# Altium PCB CUSensor.PcbDoc
Units mil, origin at the board's own origin, x right, y up, seen from the top; angles counter-clockwise.
Board outline 1673.23 x 1673.23 mil, 2 copper layers (Component Side, Bottom Layer), stack 60.8 mil thick; 43 components, 53 nets, 209 pads, 88 vias.
Unrouted connection lines stored in the file: 2.
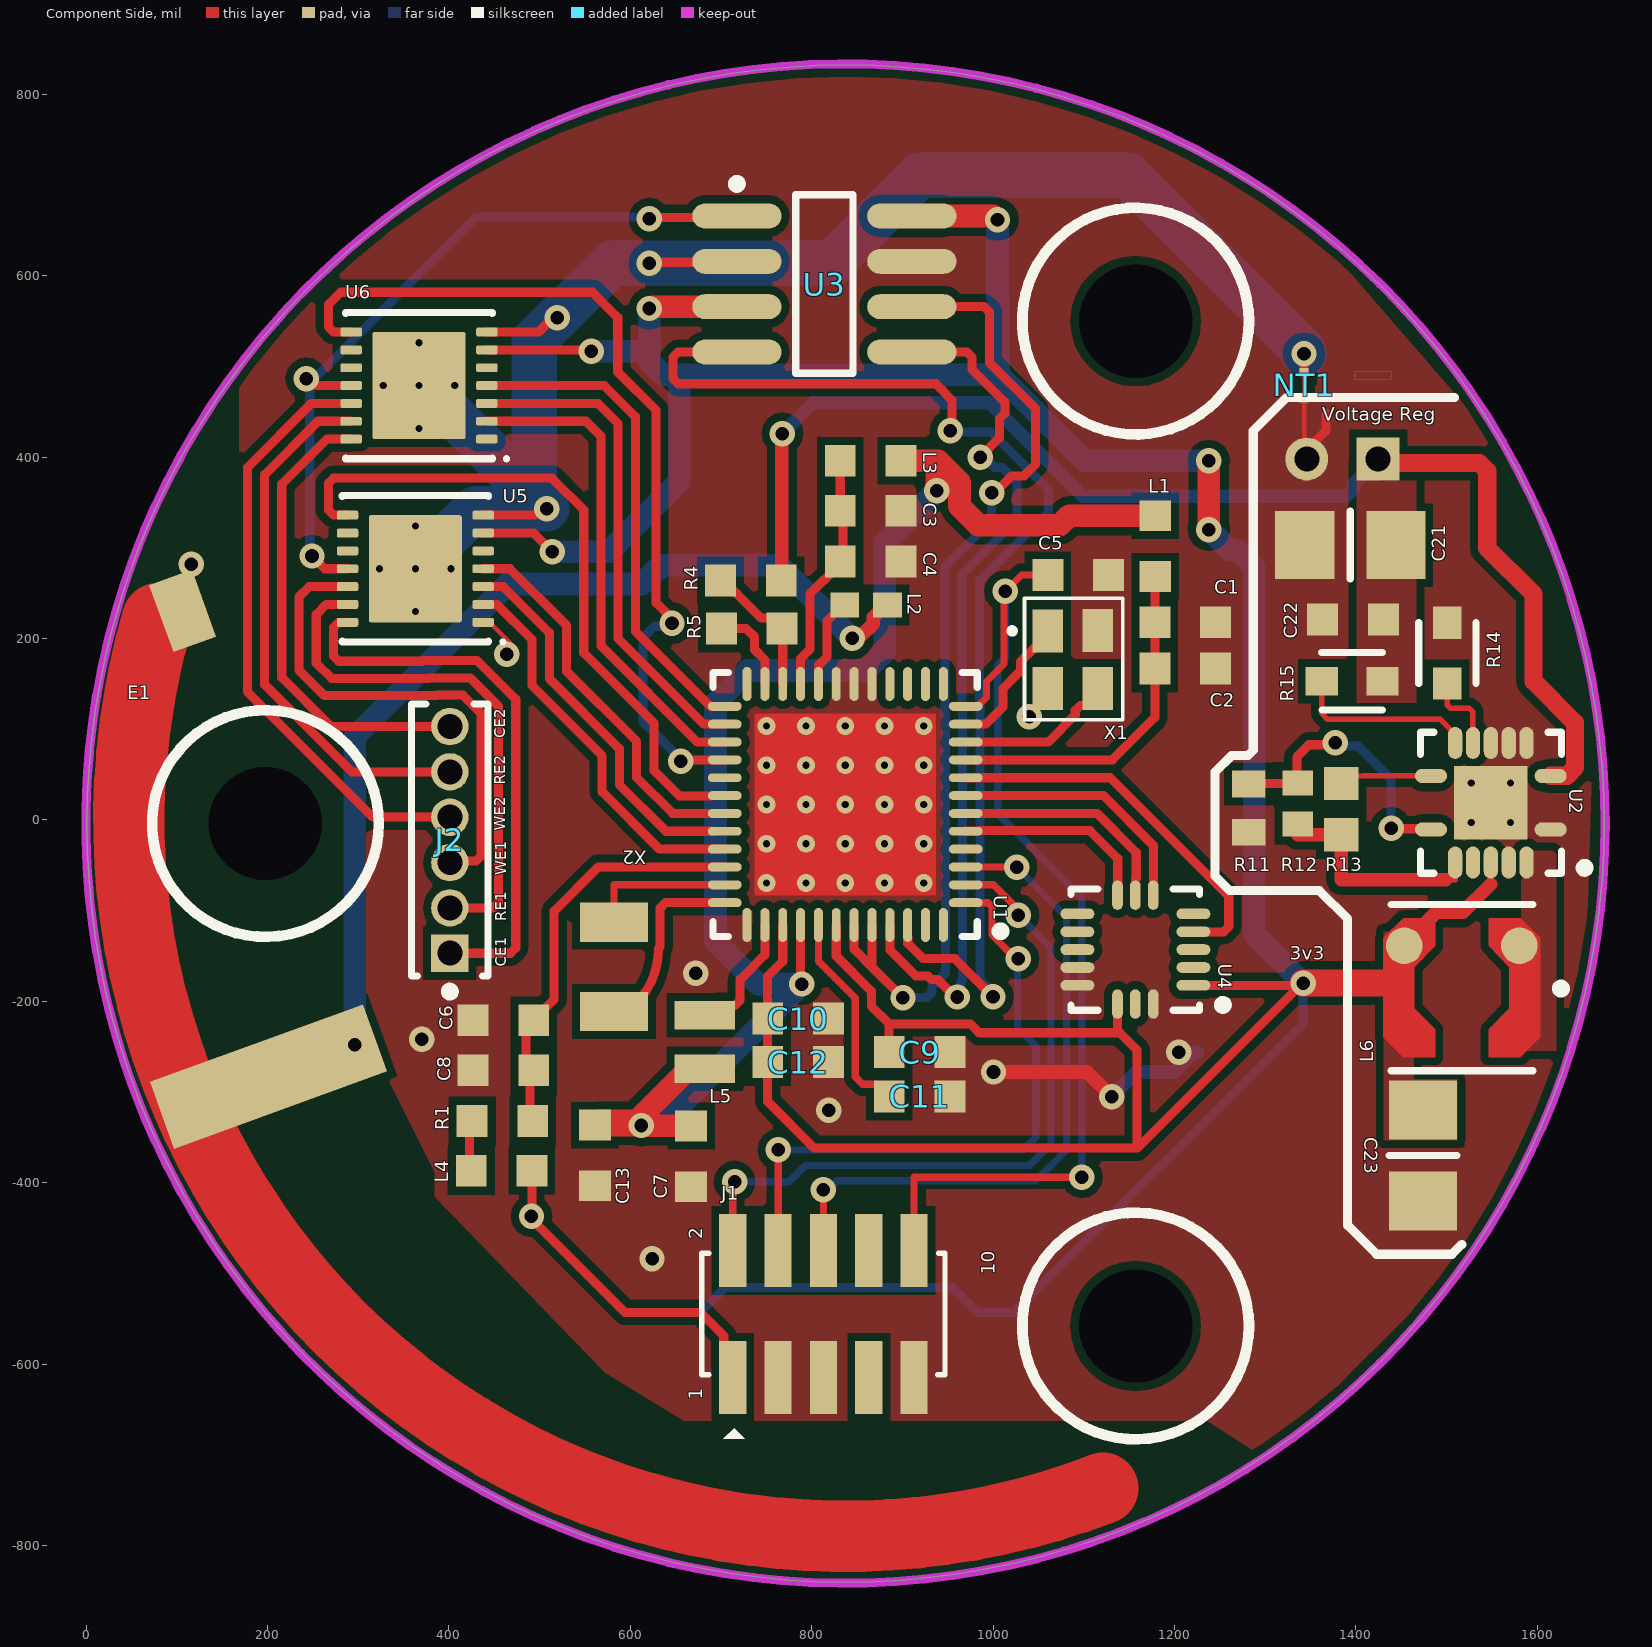
[diagram p0: Component Side view]
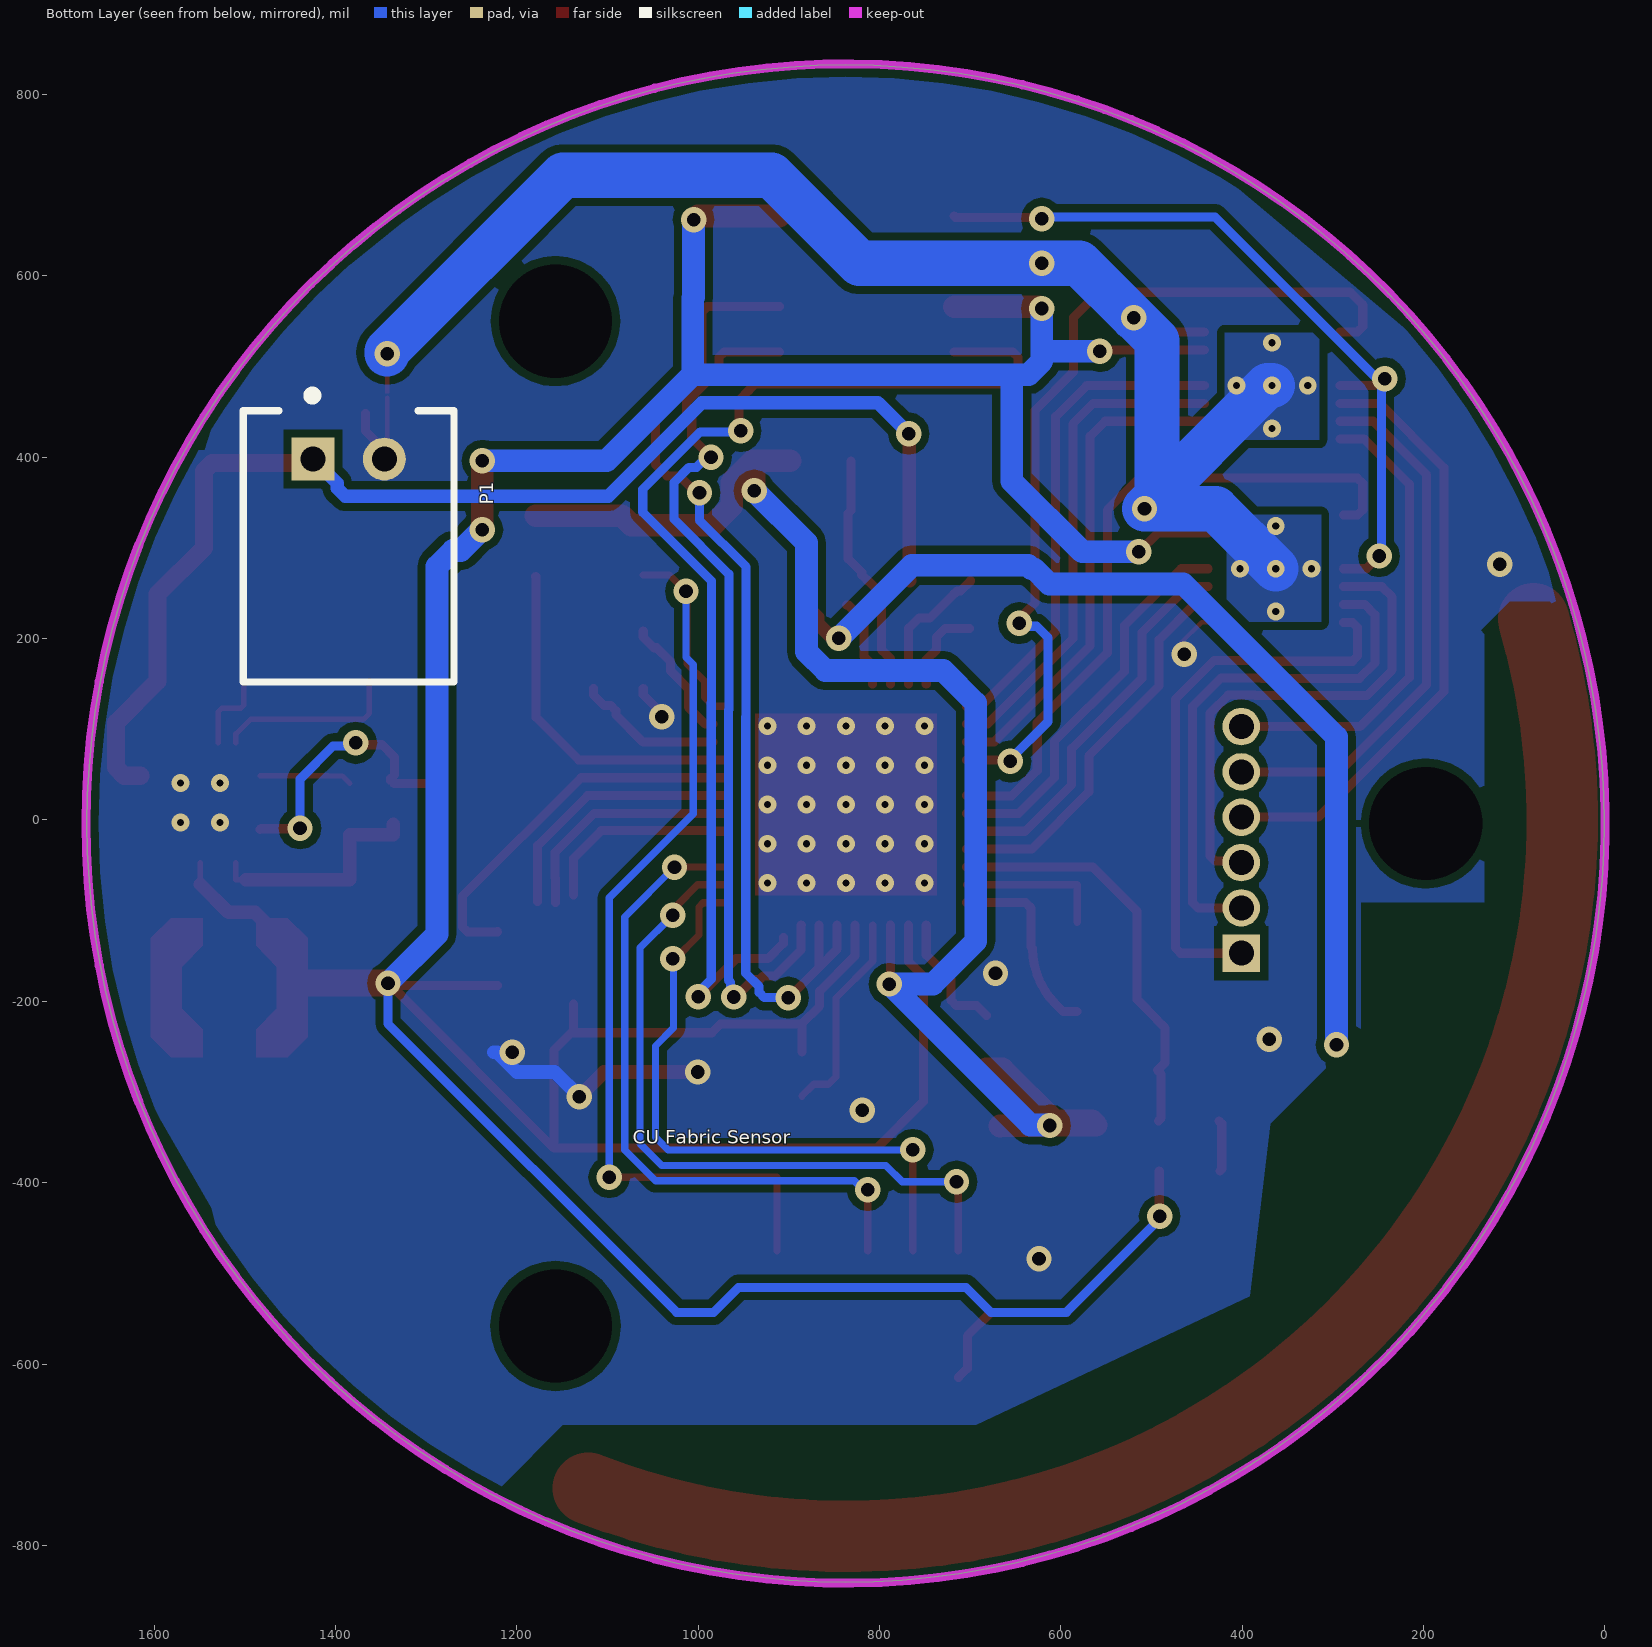
[diagram p1: Bottom Layer view, seen from below]

## Layer stack, top to bottom
Top Solder: solder mask 0.4, Solder Resist, Dk 3.5
Component Side: signal copper 1.4
Dielectric 1: core 58, FR-4, Dk 4.2
Bottom Layer: signal copper 1.4
Solder Side: solder mask 0.4, Solder Resist, Dk 3.5

## Board outline
837.39,-840.61 cw(c837.39,-4) 0.77,-4 cw(c837.39,-4) 837.39,832.61 cw(c837.39,-4) 1674,-4 cw(c837.39,-4)

## Design rules (kind name [scope] priority, off if disabled: settings)
Clearance [All] p1: gap=9 ignorepadtopadclearanceinfootprint=TRUE except(1: Arc-Arc; 8.5: Arc-SMDPad Track-SMDPad SMDPad-SMDPad)
ComponentClearance "Ignore E1 Clearance" [InComponent('E1')] p1: gap=0 collisioncheckmode=3 verticalgap=100000 showdistances=FALSE donotcheckwithout3dbody=TRUE
ComponentClearance [All] p2: gap=10 collisioncheckmode=3 verticalgap=10 showdistances=FALSE
HoleSize [All] p1: absolutevalues=TRUE maxlimit=1000 minlimit=1 maxpercent=80.000 minpercent=20.000
MinimumSolderMaskSliver [All] p1: minsoldermaskwidth=0.5
PlaneConnect [All] p1: planeconnectstyle=Direct reliefexpansion=20 reliefentries=4 reliefconductorwidth=10 reliefairgap=10
PolygonConnect [All] p1: connectstyle=Direct reliefconductorwidth=10 reliefentries=4 polygonreliefangle="90 Angle" airgapwidth=10
RoutingVias [All] p1: holewidth=15 width=28 viastyle="Through Hole" minholewidth=15 minwidth=28 maxholewidth=28 maxwidth=50
SilkToSilkClearance [All] p1: silktosilkclearance=1
SilkToSolderMaskClearance [IsPad] p1: minsilkscreentomaskgap=1 clearancetoexposedcopper=TRUE
SolderMaskExpansion [All] p1: expansion=4 istentingtop=FALSE
Width [All] p1: maxlimit=100 minlimit=5 preferedwidth=8
24 further rules are at their usual default settings.

## Components (designator, comment, footprint, x,y, rotation, side; value= is the part's Value field where it differs from the comment)
C1 "CAP CER .1UF 50V 10% X7R 0603" RESC1608N 1212,218 r180 top value=0.1uF
C2 "CAP CER 10nF 50V 10% X7R 0603" RESC1608N 1212,167 r180 top value=10nF
C3 "CAP CER .1UF 50V 10% X7R 0603" RESC1608N 865,341 r180 top value=0.1uF
C4 "CAP CER 10nF 50V 10% X7R 0603" RESC1608N 865,285 r180 top value=10nF
C5 "CAP CER .1UF 50V 10% X7R 0603" RESC1608N 1094,270 r0 top value=0.1uF
C6 "CAP CER .1UF 50V 10% X7R 0603" RESC1608N 460,-221 r0 top value=0.1uF
C7 "CAP CER 1UF 10V" RESC1608N 667,-371 r90 top value=1uF
C8 "CAP CER 10nF 50V 10% X7R 0603" RESC1608N 460,-276 r0 top value=10nF
C9 "CAP CER 1UF 10V" RESC1608N 919,-256 r180 top value=1uF
C10 "CAP CER .1UF 50V 10% X7R 0603" RESC1608N 785,-219 r180 top value=0.1uF
C11 "CAP CER 1UF 10V" RESC1608N 919,-305 r180 top value=1uF
C12 "Cap 22uF 0603" RESC1608N 785,-267 r180 top value=22uF
C13 "CAP 4.7uF  0603" RESC1608N 561,-370 r90 top value=4.7uF
C21 "22uF" FP-GCJ31C-0_3-IPC_B 1394,303 r180 top
C22 "CAP CER .1UF 50V 10% X7R 0603" RESC1608N 1397,221 r0 top value=0.1uF
C23 "22uF" FP-GCJ31C-0_3-IPC_B 1474,-370 r270 top
E1 "PCB_ANT" "PCB_ANT_2.4GHz CIRCULAR" 201,-283 r290 top locked value="50 Ohm"
J1 "SWDEBUG CONN NO SHROUD" "CONN SMT 10 pin Dual Row - 0.050\" FCI shroudless" 813,-544.88 r0 top locked
J2 "GRPB061VWVN-RC" SLIN-GRPB061VWVN-RC_V 401,-22 r90 top
L1 "MMZ1608B102C" RESC1608N 1179,302 r90 top value="1000 ohm"
L2 "Inductor 1.9nH" RESC1005N 860,237 r180 top value=1.9nH
L3 "MMZ1608B102C" RESC1608N 865,396 r0 top value="1000 ohm"
L4 "MMZ1608B102C" RESC1608N 458,-387 r0 top value="1000 ohm"
L5 "4.7uH 900mA" RESC2016N 682,-245 r270 top value=4.7uH
L6 "10uH" FP-LPS4018-MFG 1517,-185 r180 top
NT1 "TCF_NetTie1" TCF_NetTie1-Footprint-1 1343,475.55 r90 top net-tie
P1 "S2B-PH-K-S(LF)(SN)" JST-S2B-PH-K-S_V 1385.37,301.54 r180 bottom
R1 "RC1608F2R0CS" RESC1608N 459,-332 r180 top value="2 ohm"
R4 "1MEG" RESC1608N 733,264 r0 top
R5 "1MEG" RESC1608N 734,211 r0 top
R11 "4.12m" RESC1608X05N 1282,13 r90 top
R12 "634k" RESC1609X50X30LL10T20 1336,18 r270 top
R13 "8.25m" FP-CRCW0603-e3-IPC_B 1384,12 r270 top
R14 "10k" FP-RT0603-MFG 1501,184 r90 top value=10KΩ
R15 "10k" FP-RT0603-MFG 1396,153 r0 top value=10KΩ
U1 "EFR32BG12P433F1024GM48" QFN50P700X700X90_HS-49N 837,17 r180 top
U2 "TPS62736" QFN127P600-8N 1549,19 r180 top
U3 "DAC8830IBD" TI-D8_M 814,591 r0 top
U4 "ADXL362BCCZ-R2" ADI-CC-16-4_M 1157,-143 r180 top
U5 "LMP91000SDE/NOPB" NHL0014B_V 363,277 r180 top
U6 "LMP91000SDE/NOPB" NHL0014B_V 367,479 r180 top
X1 "38.4MHz" "CRYSTAL SMD 2.5x2.0 ABRACON" 1088,177 r270 top
X2 "32.768KHz" Crystal_SMD_3.2x1.5mm 582,-162 r270 top

## Footprints (in the part's own frame and the unit in brackets; to place one, negate y for a bottom-side part, rotate by r counter-clockwise, add the part's x,y. Pads: shape width x height; smd on the part's side, far side on the other; paste and mask are expansions set on the pad)
ADI-CC-16-4_M [mm] "QFN, 16-Leads, Body 3.25x3mm, Pitch 0.5mm, IPC Low Density"
  oval 0.95x0.3 smd: 1(-1.625,1) 2(-1.625,0.5) 3(-1.625,0) 4(-1.625,-0.5) 5(-1.625,-1) 9(1.625,-1) 10(1.625,-0.5) 11(1.625,0) 12(1.625,0.5) 13(1.625,1)
  oval 0.3x0.825 smd: 6(-0.5,-1.525) 7(0,-1.525) 8(0.5,-1.525) 14(0.5,1.525) 15(0,1.525) 16(-0.5,1.525)
  silkscreen extent -2.58,-1.7 1.8,1.7, body extent -1.65,-1.55 1.65,1.55, height 1.14
"CONN SMT 10 pin Dual Row - 0.050\" FCI shroudless" [mm] "FCI 20021121-00010C4LF  2x10 shroudless header 0.050\" spacing, SMT"
  rect 0.76x2.05 smd: 1(-2.54,-1.775) 2(-2.54,1.775) 3(-1.27,-1.775) 4(-1.27,1.775) 5(0,-1.775) 6(0,1.775) 7(1.27,-1.775) 8(1.27,1.775) 9(2.54,-1.775) 10(2.54,1.775)
  silkscreen extent -3.4,-3.5 3.4,1.7, body extent -3.17,-2.75 3.17,2.75, height 4.51
"CRYSTAL SMD 2.5x2.0 ABRACON" [mm] "Pads for Abracon Crystal 2.5x2mm"
  rect 1.2x0.85 smd: 1(-0.8,-0.7) 2(0.813,-0.7) 3(0.813,0.7) 4(-0.813,0.7)
  silkscreen extent -1.71,-1.76 1.69,1.4, body extent -1.3,-1.05 1.3,1.05, height 0.6
Crystal_SMD_3.2x1.5mm [mm] "Pads to fit typical 32.768 crystal such as ECX-31B"
  rect 1.1x1.9 smd: 1(-1.25,0) 2(1.25,0)
  body extent -1.62,-0.77 1.62,0.77, height 0.9
FP-CRCW0603-e3-IPC_B [mil]
  rect 36.81x37.88 smd paste+0 mask+0: 1(-28.17,0) 2(28.17,0)
  body extent -56,-29 56,29, height 10
FP-GCJ31C-0_3-IPC_B [mil]
  rect 65.08x74.97 smd paste+0 mask+0: 1(-50.22,0) 2(50.22,0)
  silkscreen extent 0,-37 0,37, body extent -93,-47 93,47, height 10
FP-LPS4018-MFG [mil]
  round 40.39 smd paste+0 mask+0: 1(-63.42,-46.25) 2(63.42,-46.25)
  Component Side region: -86.61,-54.92 -86.61,54.92 -64.57,76.57 -29.53,76.57 -29.53,46.06 -52.36,22.64 -52.36,-22.64 -29.53,-46.06 -29.53,-76.57 -64.57,-76.57
  Component Side region: 86.61,-54.92 86.61,54.92 64.57,76.57 29.53,76.57 29.53,46.06 52.36,22.64 52.36,-22.64 29.53,-46.06 29.53,-76.57 64.57,-76.57
  silkscreen extent -114,-92 78,92, body extent -91,-82 91,82, height 10
FP-RT0603-MFG [mm]
  rect 0.9x0.8 smd paste+0 mask+0: 1(-0.85,0) 2(0.85,0)
  silkscreen extent -0.85,-0.81 0.86,0.8, body extent -1.4,-0.55 1.4,0.55, height 0.25
JST-S2B-PH-K-S_V [mm] "THD, 2-Leads, Body 7.6x5.9mm, Pitch 2mm"
  rect 1.2x1.2 hole 0.7: 1(-1,2.45)
  round 1.2 hole 0.7: 2(1,2.45)
  silkscreen extent -2.95,-3.8 2.95,4.35, body extent -2.95,-3.8 2.95,3.8, height 4.8
NHL0014B_V [mm] "SON, 10-Leads, Body 4x4mm, Pitch 0.5mm, Thermal Pad 3x2.6mm, TI Recommend"
  rrect40% 0.6x0.25 smd: 1(-1.9,1.5) 2(-1.9,1) 3(-1.9,0.5) 4(-1.9,0) 5(-1.9,-0.5) 6(-1.9,-1) 7(-1.9,-1.5) 8(1.9,-1.5) 9(1.9,-1) 10(1.9,-0.5) 11(1.9,0) 12(1.9,0.5) 13(1.9,1) 14(1.9,1.5)
  rrect4% 2.6x3 smd paste-1.3: 15(0,0)
  silkscreen extent -2.5,-2.05 2.05,2.1, body extent -2,-2 2,2, height 0.8
"PCB_ANT_2.4GHz CIRCULAR" [mm]
  rect 2x6.35 smd paste-4.5 mask+0: 1(0,0)
  rect 2x1.27 smd paste-4.5 mask+0: 2(-13.077,2.2)
  Component Side lines w2: -13.107,1.465 ccw(c-1.23,17.639) 18.833,18.021
QFN50P700X700X90_HS-49N [mm] "QFN, 48-Leads, Body 7.00x7.00mm, Pitch 0.50mm, Thermal Pad 5.30x5.30mm, IPC Medium Density"
  oval 0.95x0.25 smd: 1(-3.375,2.75) 2(-3.375,2.25) 3(-3.375,1.75) 4(-3.375,1.25) 5(-3.375,0.75) 6(-3.375,0.25) 7(-3.375,-0.25) 8(-3.375,-0.75) 9(-3.375,-1.25) 10(-3.375,-1.75) 11(-3.375,-2.25) 12(-3.375,-2.75) 25(3.375,-2.75) 26(3.375,-2.25) 27(3.375,-1.75) 28(3.375,-1.25) 29(3.375,-0.75) 30(3.375,-0.25) 31(3.375,0.25) 32(3.375,0.75) 33(3.375,1.25) 34(3.375,1.75) 35(3.375,2.25) 36(3.375,2.75)
  oval 0.25x0.95 smd: 13(-2.75,-3.375) 14(-2.25,-3.375) 15(-1.75,-3.375) 16(-1.25,-3.375) 17(-0.75,-3.375) 18(-0.25,-3.375) 19(0.25,-3.375) 20(0.75,-3.375) 21(1.25,-3.375) 22(1.75,-3.375) 23(2.25,-3.375) 24(2.75,-3.375) 37(2.75,3.375) 38(2.25,3.375) 39(1.75,3.375) 40(1.25,3.375) 41(0.75,3.375) 42(0.25,3.375) 43(-0.25,3.375) 44(-0.75,3.375) 45(-1.25,3.375) 46(-1.75,3.375) 47(-2.25,3.375) 48(-2.75,3.375)
  rect 5.3x5.3 on Mech13: 49(0,0)
  Component Side region: -2.54,2.54 2.54,2.54 2.54,-2.54 -2.54,-2.54
  silkscreen extent -4.47,-3.7 3.7,3.7, body extent -3.55,-3.55 3.55,3.55, height 0.9
QFN127P600-8N [mm]
  oval 0.9x0.4 smd: 1(-1.675,-0.75) 7(1.675,-0.75) 8(1.675,0.75) 14(-1.675,0.75)
  oval 0.4x0.9 smd: 2(-1,-1.675) 3(-0.5,-1.675) 4(0,-1.675) 5(0.5,-1.675) 6(1,-1.675) 9(1,1.675) 10(0.5,1.675) 11(0,1.675) 12(-0.5,1.675) 13(-1,1.675)
  rect 2.05x2.05 smd: 15(0,0)
  silkscreen extent -2.75,-1.97 1.97,1.97, body extent -1.83,-1.83 1.83,1.83, height 1
RESC1005N [mm] "Chip Resistor, Body 1.1x0.5mm, IPC Medium Density"
  rect 0.8x0.7 smd: 1(-0.6,0) 2(0.6,0)
  body extent -0.55,-0.3 0.55,0.3, height 0.4
RESC1608N [mil] "Chip Resistor, Body 1.6x0.8mm, IPC Medium Density"
  rect 34x35 smd: 1(-33.46,0) 2(33.46,0)
  body extent -33,-19 33,19, height 24
RESC1608X05N [mm] "Chip Resistor, 2-Leads, Body 1.58x0.85mm, IPC Medium Density"
  rect 0.75x0.95 smd: 1(-0.675,0) 2(0.675,0)
  body extent -0.82,-0.48 0.82,0.48, height 0.5
RESC1609X50X30LL10T20 [mm] "Chip Resistor, 2-Leads, Body 1.55x0.85mm, IPC High Density"
  rect 0.7x0.85 smd: 1(-0.575,0) 2(0.575,0)
  body extent -0.82,-0.48 0.82,0.48, height 0.5
RESC2016N [mm] "Chip Resistor, Body 2.0x1.6mm, IPC Medium Density"
  rect 0.8x1.7 smd: 1(-0.75,0) 2(0.75,0)
  body extent -1.05,-0.85 1.05,0.85, height 1
SLIN-GRPB061VWVN-RC_V [mm] "Header, 6-Leads, Body 7.62x2.14mm, Pitch 1.27mm"
  rect 1.05x1.05 hole 0.7: 1(-3.175,0)
  round 1.05 hole 0.7: 2(-1.905,0) 3(-0.635,0) 4(0.635,0) 5(1.905,0) 6(3.175,0)
  silkscreen extent -4.37,-1.07 3.81,1.07, body extent -3.81,-1.07 3.81,1.07, height 4
TCF_NetTie1-Footprint-1 [mil]
  rect 10x10 smd mask-10: A(-10,0) B(18,0)
  Component Side region: -5.5,-2.5 14.5,-2.5 14.5,2.5 -5.5,2.5
TI-D8_M [mm] "SOIC, 8-Leads, Body 4.9x3.9mm, Pitch 1.27mm, IPC Low Density"
  oval 2.5x0.7 smd: 1(-2.45,1.905) 2(-2.45,0.635) 3(-2.45,-0.635) 4(-2.45,-1.905) 5(2.45,-1.905) 6(2.45,-0.635) 7(2.45,0.635) 8(2.45,1.905)
  silkscreen extent -2.57,-2.5 0.8,2.93, body extent -2,-2.5 2,2.5, height 1.75

## Part data
C1 C3 C5 C6 C10: library part "Cap Ceramic 0.1uF 0603_50V", Manufacturer=Murata, Manufacturer Part#=GRM188R71H104KA93D, PackageDocument=Mar-2001, Voltage=50V, COST=$0.006, Digikey Part#=490-1519-2-ND, Note="Footprint corresponds to dimensions for bulk cassette packaging. This case size has tightened tolerances.", PackageReference=0603
  C1: Supplier 1=Digi-Key, Supplier 2=Digi-Key, Supplier Part Number 2=587-3247-1-ND
  C3: Supplier 1=Mouser
  C5: Supplier 1=Arrow, Supplier Part Number 1=GRM188R71H104KA93D
C2 C4 C8: library part "Cap Ceramic 10nF 0603", "CAP CER 10000PF 50V 10% X7R 0603", Manufacturer=Murata, Manufacturer Part#=GRM188R71H103KA01D, Voltage=50V, COST=$0.005, Digikey Part#=490-1512-1-ND, PackageReference=0603
  C2: Supplier 1=Digi-Key
  C4: Supplier 1=Arrow
C7 C9 C11: library part "Cap Ceramic 1uF_10V_ 0603", "CAP CER 1UF 10V 10% X7R 0603", Manufacturer=Taiyo-Yuden, Manufacturer Part#=LMK107B7105KA-T, Voltage=10V, COST=0.007, Digikey Part#=587-1242-2-ND, PackageReference=0603
C12: library part "Cap Ceramic 22uF 0603 6.3V", "CAP CER 22UF 6.3V 20% X5R 0603", Manufacturer="Samsung Electro-Mechanics America", Manufacturer Part#=CL10A226MQ8NRNE, Voltage=6.3V, COST=$0.051, Digikey Part#=1276-2868-2-ND, PackageReference=0603
C13: library part "Cap Ceramic 4.7UF 16V 0603", "CAP CER 4.7UF 16V 10% X5R 0603", Manufacturer="Taiyo Yuden", Manufacturer Part#=EMK107ABJ475KA-T, Voltage=16V, COST=$0.047, Digikey Part#=587-2786-2-ND, PackageReference=0603
C21 C23: library part CMP-06035-051043-1, "Cap Ceramic 22uF 10V X7R 10% Pad SMD 1206 Soft Termination  +125°C Automotive T/R"
C22: library part "Cap Ceramic 0.1uF 0603_50V", Manufacturer=Murata, Manufacturer Part#=GRM188R71H104KA93D, PackageDocument=Mar-2001, Voltage=16V, COST=$0.006, Digikey Part#=490-1519-2-ND, Note="Footprint corresponds to dimensions for bulk cassette packaging. This case size has tightened tolerances.", PackageReference=0603, Supplier 1=Mouser
E1: library part Antenna_2.4GHZ_Printed_Copper_Circular, "Antenna 2.4GHz_PCB Printed", COST=$0.0
J1: library part "CONN JTAG SMT NO SHROUD NXP", "CONN HEADER 10POS DL UNSHRD SMD", Manufacturer=FCI, Manufacturer Part#=20021121-00010C4LF, COST=$0.60, Digikey Part#=609-3695-1-ND, Note=2x5, PackageReference="SMT_2x5_050\""
J2: library part CMP-2000-06374-1, "Male Header, Pitch 1.27 mm, 1 x 6 Position, Height 4 mm, Tail Length 2.3 mm, -40 to 105 degC, RoHS, Bulk", Manufacturer=Sullins, Package Description="Male Header, Pitch 1.27 mm, 1 x 6 Position, Height 4 mm, Tail Length 2.3 mm", Standard Package=1, Catalog Drawings=S9014ESeriesTop, Category=Connectors,Interconnects, Connector Type=Header,Unshrouded, Contact Finish=Gold, Contact Finish Thickness=Flash, Contact Mating Length="0.118\"(3.00mm)", Contact Type=MalePin, Datasheet URL=http://www.sullinscorp.com/drawings/71_GRPB___1VWVN-RC,_10957-C.pdf, Datasheet Version="Rev. C, 12/2008", Dynamic Catalog=GRPB, Family=RectangularConnectors-Headers,MalePins, Manufacturer URL=http://www.sullinscorp.com/, Mating Products="S9010E-06-ND / -CONNHEADER.050\"6POSR/APCB / S9008E-06-ND / -CONNHEADER.050\"6POSPCBGOLD / S9005E-06-ND / -CONNHEADER.050\"6POSSMDGOLD", Mounting Technology=ThroughHole, Mounting Type=ThroughHole, Number of Positions=6, Number of Positions Loaded=All, Number of Rows=1, Other Names=S9014E-06, Package Reference=GRPB061VWVN-RC, Packaging=Bulk, Pitch="0.050\"(1.27mm)", Termination=Solder
L1 L3 L4: library part "Ind Filter 0.3A_0603", "FERRITE CHIP 1000 OHM 300MA 0603", Manufacturer=TDK, COST=$0.025, Digikey Part#=445-8672-1-ND, Imax=300mA, Manufacturer Part#=MMZ1608B102C, PackageReference=0603
L2: library part "Ind Signal 1.9nH 220mA 300mohm 0402", Manufacturer=Murata, Manufacturer Part#=LQP15MN1N9W02D, COST=$0.09, Digikey Part#=490-11739-6-ND, PackageReference=0402
L5: library part "IND PWR 4.7uH 900mA 360mohm 0806", "FIXED IND 4.7UH 900MA 360 MOHM", Current Rating=1.6A, Manufacturer=Bourns, Manufacturer Part#=SRN2010TA-4R7M, COST=$0.50, DCR="360 mOhm", Digikey Part#=SRN2010TA-4R7MCT-ND, Isat=900mA, PackageReference=0806
L6: library part CMP-11268-000063-1, "Shielded Power Inductors", DC Resistance (DCR)=200mR, Inductance Tolerance=20%, Max DC Current=1.3A, Max Operating Temperature=85°C, Min Operating Temperature=-40°C, Package Quantity=1, RMS Current (Irms)=900mA, Saturation Current=1.2A, Self Resonant Frequency=40MHz, Test Frequency=100kHz, Core Material=Ferrite, Height=1.7mm, Inductance=10uH, Length=4mm, Packaging="Cut Tape", REACH SVHC="No SVHC", Shielding=Shielded, Termination=SMD/SMT, Tolerance=20%, Weight=0.003527oz, Width=4mm
NT1: library part CMP-001-0001-3, "A Net Tie"
P1: library part CMP-1755-00004-1, "Male Header, Pitch 2 mm, 1 x 2 Position, Height 4.8 mm, Tail Length 3.4 mm, -25 to 85 degC, RoHS, Bulk", Capacitance="10 uF", Case\Package=Radial, Max Operating Temperature="85 degC", Min Operating Temperature="-40 degC", Package Quantity=200, Tolerance=20%, Voltage Rating="50 V", ComponentLink1Description=Datasheet, ComponentLink1URL=http://www.jst-mfg.com/product/pdf/eng/ePH.pdf, DatasheetVersion=Dec-12, Diameter="5 mm", Height="11 mm", Lead Pitch="2 mm", Length="11 mm", Mount="Through Hole", PackageDescription="Male Header, Pitch 2 mm, 1 x 2 Position, Height 4.8 mm, Tail Length 3.4 mm", PackageReference=S2B-PH-K-S, Packaging=Bulk, Pins=2, Radiation Hardening=No, REACH SVHC="No SVHC", RoHSCompliant=true, Voltage Rating (DC)="50 V"
R1: library part "RES SMT 2 ohm  1% 0603", "RES SMD 2 OHM 1% 1/10W 0603", Manufacturer=Samsung, COST=$0.001, Digikey Part#=1276-4476-1-ND, Manufacturer Part#=RC1608F2R0CS, Note=+/-1%, PackageReference=0603
R4 R5: library part "RES SMT 1MEG 1% 0603", "RES SMD 1M OHM 1% 1/10W 0603", Manufacturer=Panasonic, Manufacturer Part#=ERJ-3EKF1004V, COST=$0.002, Digikey Part#=P1.00MHTR-ND, Note=+/-1%, PackageReference=0603
R11: library part CMP-009-00178-1, "RES SMD 4.12M OHM 1% 1/10W 0603"
R12: library part CMP-1012-00827-2, Manufacturer="Vishay Dale", Part Number=CRCW0603634KFKEA
R13: library part CMP-02407-005912-1, "RES Thick Film, 8.25MΩ, 1%, 0.1W, 100ppm/°C, 0603", Case Code (Imperial)=0603, Case Code (Metric)=1608, Max Operating Temperature=155°C, Max Power Dissipation=100mW, Min Operating Temperature=-55°C, Package Quantity=10, Resistance=8.25MR, Temperature Coefficient=100ppm/°C, Tolerance=1%, Voltage Rating=75V, Case/Package=0603, Composition="Thick Film", Contact Plating=Tin, Depth=0.85mm, Features="Automotive AEC-Q200", Height=0.02inch, Lead Free="Lead Free", Length=1.55mm, Military Standard=Not, Number of Terminations=2, Packaging="Tape and Reel", Power Rating=100mW, Radiation Hardening=No, Termination=SMD/SMT, Voltage Rating (DC)=75V, Weight=7.1E-05oz, Width=0.033inch
R14 R15: library part CMP-2000-04517-2, "RES SMD 10K OHM 0.1% 1/10W 0603", Manufacturer=Yageo, Manufacturer Part Number=RT0603BRE0710KL, Package=RT0603, Power Rating=0.1W, Resistance=10KΩ, Temperature="-55°C to +155°C", Temperature Coefficient="50 ppm/°C", Temperature Range High=+155°C, Temperature Range Low=-55°C, Tolerance=0.001, Voltage Rating=75V, Automotive=No, Category=Res, ComponentLink2Description=Datasheet, ComponentLink2URL=http://www.yageo.com/documents/recent/PYu-RT_1-to-0.01_RoHS_L_9.pdf, Composition="Thin Film", Device Class L1="Passive Components", Device Class L2=Resistors, Device Class L3="Chip SMD Resistors", Digikey Description="RES SMD 10K OHM 0.1% 1/10W 0603", Footprint Url=http://www.yageo.com/exep/pages/download/literatures/PYu-R_Mount_10.pdf, Height=0.55mm, Ipc Land Pattern Name=RESC16080X45, Lead Free=Yes, Mouser Description="Res Thin Film 0603 10K Ohm 0.1% 1/10W ±50ppm/°C Molded SMD SMD Paper T/R", Octopart=https://octopart.com/rt0603bre0710kl-yageo-1273959, RoHS=TRUE, Series=RT
U2: library part CMP-019-00051-4, "High Efficiency Nanopower Buck Converter with 50mA Load Capability"
U3: library part CMP-0004-00140-1, "16-Bit, Ultra-Low Power, Voltage Output Digital to Analog Converter, -40 to 85 degC, 8-pin SOIC (D8), Green (RoHS & no Sb/Br)", Manufacturer="Texas Instruments", Power Consumption(Typ)(mW)=0.015, Code_JEDEC=MS-012, ComponentLink1Description="Manufacturer URL", ComponentLink1URL=http://www.ti.com/, ComponentLink2Description=Datasheet, ComponentLink2URL=http://www.ti.com/general/docs/lit/getliterature.tsp?genericPartNumber=DAC8830&fileType=pdf, ComponentLink3Description="Package Specification", ComponentLink3URL=http://www.ti.com/litv/pdf/msoi002j, DAC Channels=1, DatasheetVersion=SLAS449D, DNL(Max)(+/-LSB)=1, Eco-Plan="Green (RoHS & no Sb/Br)", INL(Max)(+/-LSB)=2, Interface="Serial SPI", Mounting Technology="Surface Mount", PackageDescription="8-Pin Plastic Small Outline, Body 4.9 x 3.9 mm, Pitch 1.27 mm", PackageReference=D8, PackageVersion="4040047-3/M, 06/2011", PartNumber=DAC8830IBD, Resolution(Bits)=16, Settling Time(us)=1, SubFamily="Precision DAC (=<10MSPS)"
U4: library part CMP-0885-00039-1, "Micropower, 3-Axis, +/-2 g / +/-4 g / +/-8 g Digital Output MEMS Accelerometer with 200 Hz BW, Industrial, 16-pin LGA, Reel", Manufacturer="Analog Devices", Supply Current="1.8 uA", Voltage Supply (V)="1.6 to 3.5", # of Axes=3, -3dB Bandwidth="200 Hz", ComponentLink1Description="Manufacturer URL", ComponentLink1URL=http://www.analog.com/en/index.html, ComponentLink2Description=Datasheet, ComponentLink2URL=http://www.analog.com/static/imported-files/data_sheets/ADXL362.pdf, ComponentLink3Description="Package Specification", ComponentLink3URL=http:/www.analog.com/static/imported-files/packages/PKG_PDF/LGA(CC)/CC_16_4.pdf, ComponentLink4Description="Product URL", ComponentLink4URL=http://www.analog.com/en/mems-sensors/mems-inertial-sensors/adxl362/products/product.html, DatasheetVersion="Rev. B", Mounting Technology="Surface Mount", Output Type=Digital, PackageDescription="16-Pin Land Grid Array, 3.25 x 3 mm Body, 0.5 mm Pitch", PackageReference=CC-16-4, PackageVersion="10-23-2012-A, 10/2012", Packing=Reel, PartNumber=ADXL362BCCZ-R2, Sensitivity="1/2/4 mg/LSB"
U5 U6: library part CMP-0064-00201-2, "Configurable AFE Potentiostat for Low-Power Chemical Sensing Applications, 14-pin LLP, 250 Reel", Manufacturer="Texas Instruments", PackageTopMarking=NS*UZXYTT*L91000, PowerWise=N, ComponentLink1Description="Datasheet URL", ComponentLink1URL=http://www.ti.com/general/docs/lit/getliterature.tsp?genericPartNumber=LMP91000&fileType=pdf, CompType=OtherParts, PackageDescription="LLP, Plastic, Dual, 4 x 4 x 0.8mm Body, 14 Lead, 0.5mm Pitch, No Pullback", PackageReference=NHL0014B, PinCount=14, RoHS=Y
X1: library part "CRYSTAL 38.4MHZ 7PF_SMD_2.5mmx2mm", "CRYSTAL 38.4MHZ 7pF", Manufacturer=Abracon, Manufacturer Part#=ABM10W-38.4000MHZ-7-D1X-T3, COST=$0.42, Digikey Part#=535-13784-2-ND, PackageReference=4-SMD
X2: library part "Crystal_32.768KHz 12.5pF SMD 3.2x1.5mm ECS ECS-.327-12.5-34B-TR", "CRYSTAL 32.7680KHZ 12.5PF SMD", Manufacturer=ECS, Manufacturer Part#=ECS-.327-12.5-34B-TR, COST=$0.244, CPAR=12.5pF, Digikey Part#=XC1617TR-ND, PackageReference=SMD_3.2x1.5

## Free pads (board coordinates)
  round 0 hole 125 unplated paste+0: 1(197.62,-4)
  round 0 hole 125 unplated: 1(1157.27,-558.05) 1(1157.27,550.05)

## Via types
v1: diameter 28, hole 15, Component Side to Bottom Layer, 49 vias
v2: diameter 19.68, hole 7.87, Component Side to Bottom Layer, 39 vias

## Nets (pads, with @x,y where several pads share a name; then routed paths per layer and width w, separated by ;. In a path a pad name is that pad's centre, name@x,y a point inside that pad or via, vN(x,y) a via of type N, cw(c..) or ccw(c..) an arc to the next point about the centre after c; other vN are vias at no path point)
ACC_INT1: U4.11
ACC_INT2: U4.9
ACC_SPI_EN_LOW: U1.5 U4.8 | length 221.2
  Component Side w10: U1.5 983.5,-12.53 984.18,-11.84 1106.84,-11.84 1137.59,-42.59 1137.59,-82.68 U4.8
ACC_SPI_MISO: U1.6 U4.7 | length 261.1
  Component Side w10: U1.6 1114.71,7.16 1158,-36.13 1158,-63.87 1157.28,-64.59 U4.7@1157.28,-90.86
ACC_SPI_MOSI: U1.7 U4.6 | length 291.5
  Component Side w10: U1.7 1121.9,26.84 1177,-28.26 U4.6@1177,-89.86
ACC_SPI_SCLK: U1.8 U4.4 | length 419.3
  Component Side w10: U1.8 1129.08,46.53 1260,-84.39 1260,-117.74 1254.14,-123.59 1221.26,-123.59 U4.4
AGND: NT1.B U3.2 U5.7 U5.15 U6.7 U6.15 | length 1823.8
  Component Side w10: U5.7 495.67,336.06 502.87,343.26 v1(507.74,343.26) ; U6.7 498.88,538.06 514.75,553.92 v1(519.62,553.92) ; v1(621,614) 622,615 716.54,615 U3.2 ; NT1.B v1(1343,514)
  Bottom Layer w50: v2(363,277) 429.26,343.26 v1(507.74,343.26) 372,479 v2(367,479) ; 494,357 494,528.6 519.33,553.92 v1(519.62,553.92) 579.69,614 v1(621,614) 822,614 919,711 1149,711 1343,517 v1(1343,514)
  other v2: 363,229.76 323.63,277 402.37,277 363,324.24 367,431.76 327.63,479 406.37,479 367,526.24
BATT_PWR_MON_HI: R4.1 R5.2 U1.22 | length 152.2
  Component Side w10: R4.1 699.54,263.5 710.54,252.5 714.07,252.5 717.57,249 718.04,249 744.54,222.5 756.46,222.5 767.46,211.5 768.1,211.5 U1.22
BATT_PWR_MON_LO: R5.1 U1.23 | length 96.9
  Component Side w10: R5.1 727.76,211 736.96,201.79 736.96,187.91 748.42,176.46 U1.23
CE1: J2.1 U5.14 | length 619.9
  Component Side w10: U5.14 278.52,217.94 272.66,212.09 272.66,180.86 278.52,175 370.23,175 370.9,175.67 431.1,175.67 473.67,133.1 473.67,-141.14 467.81,-147 J2.1
CE2: J2.6 U6.14 | length 517.9
  Component Side w10: U6.14 265.39,419.94 215.66,370.22 215.66,157.25 269.91,103 J2.6
DAC_3W_SPI_SCLK: U1.45 U3.5 | length 976.2
  Component Side w10: U1.45 886.29,-115.95 886.29,-143.28 915.01,-172 928,-172 931.96,-175.96 939.03,-175.96 958.37,-195.3 v1(960.7,-195.3) ; U3.5 971.14,516 977,510.14 977,496.6 1013,460.6 1013,448.48 1006.96,442.44 1006.96,421.22 v1(985.73,399.99)
  Bottom Layer w10: v1(960.7,-195.3) 964.15,-191.85 964.15,-179.13 966.46,-176.82 966.46,121.36 966,121.82 966,271.13 1026.5,331.63 1026.5,372.22 1010.1,388.63 1001.96,388.63 990.6,399.99 v1(985.73,399.99)
DAC_3W_SPI_SDIO: U1.43 U1.44 U3.6 | length 1100.7
  Component Side w10: U1.43 846.84,-142.64 866.53,-162.33 ; U1.44 866.53,-162.33 ; v1(900.68,-196.06) 900.26,-196.06 866.53,-162.33 ; U3.6 990.14,566 996,560.14 996,504.47 1047,453.47 1047,392.21 1034.21,379.42 1020.72,379.42 1001.93,360.63 v1(998.5,360.63)
  Bottom Layer w10: v1(900.68,-196.06) 926.84,-196.06 932.7,-190.2 932.7,-183.7 947.46,-168.95 947.46,113.49 947,113.95 947,279 998.5,330.5 v1(998.5,360.63)
DAC_EN_LOW: U1.46 U3.4 | length 1305.7
  Component Side w10: U3.4 652.86,516 647,510.14 647,486.86 652.86,481 937,481 944.07,473.93 944.07,473.67 954.74,463 954.74,430.74 v1(953,429) ; U1.46@905.98,-129.57 905.98,-136.1 922.88,-153 958,-153 v1(1000,-195)
  Bottom Layer w10: v1(953,429) 954.01,427.99 997.6,427.99 1061,364.59 1061,339.26 985,263.26 985,129.69 985.46,129.23 985.46,-175.59 1000,-190.13 v1(1000,-195)
EN1: R14.1 U2.5 | length 89.6
  Component Side w6: R14.1 1501,126.51 1504.51,123 1525.49,123 1529,119.49 1529,85.26 U2.5
EN2: R15.1 U2.6 | length 201.9
  Component Side w6: R15.1 1362.54,117.46 1369,111 1493.42,111 1509.63,94.79 U2.6
GND: C1.1 C2.1 C3.1 C4.1 C5.2 C6.1 C7.1 C8.1 C9.1 C10.1 C11.1 C12.1 C13.1 C21.2 C22.1 C23.2 E1.2 J1.3 J1.5 J1.9 NT1.A P1.2 R11.1 R14.2 U1.17 U1.18 U1.19 U1.37 U2.2 U2.3 U2.4 U2.12 U2.14 U2.15 U3.7 U4.12 U4.13 U4.16 U5.1 X1.2 X1.4 | length 476.6
  Component Side w5: U5.1 444.69,217.94 467.6,195.04 467.6,186.6 v1(463.68,182.68) ; NT1.A 1343,401 P1.2
  Component Side w10: v1(1039.9,113.9) 1039.9,117.58 1060.44,138.12 X1.2 ; P1.2 1346,408.08 1367,429.08 1367,448
  Component Side w15: v1(1000.5,-278) 1103.79,-278 v1(1130.9,-305.1)
  Bottom Layer w15: v1(1130.9,-305.1) 1158,-278 1199.88,-278 1221.68,-256.2 1225.2,-256.2
  other v1: 624,-484 819,-320 1205,-256 370,-242 672,-169 116,282
  other v2: 750.39,-69.61 793.69,-69.61 837,-69.61 880.31,-69.61 923.61,-69.61 750.39,-26.31 793.69,-26.31 837,-26.31 880.31,-26.31 923.61,-26.31 1527.35,-2.65 1570.65,-2.65 750.39,17 793.69,17 837,17 880.31,17 923.61,17 1527.35,40.65 1570.65,40.65 750.39,60.31 793.69,60.31 837,60.31 880.31,60.31 923.61,60.31 750.39,103.61 793.69,103.61 837,103.61 880.31,103.61 923.61,103.61
LMP1_EN_LOW: U1.33 U5.2 | length 431.1
  Component Side w10: U5.2 437.88,237.55 452.87,237.55 491.68,198.74 491.68,148.1 569,70.78 569,31 632.21,-32.21 U1.33
LMP1_I2C_SCLK: U1.32 U5.3 | length 417.4
  Component Side w10: U5.3 437.88,257.24 460.05,257.24 510.68,206.61 510.68,155.97 588,78.65 588,38.87 639.4,-12.53 U1.32@690.43,-12.53
LMP1_I2C_SDA: U1.31 U5.4 | length 431.1
  Component Side w10: U5.4 467.16,277 529.68,214.48 529.68,163.84 607,86.52 607,46.74 646.58,7.16 U1.31
LMP1_TEMP: U1.30 U5.8 | length 761
  Component Side w10: U5.8 272.86,336.06 267,341.91 267,371.14 272.86,377 513.6,377 548.68,341.91 548.68,184.25 626,106.94 626,54.61 654.45,26.16 689.82,26.16 690.5,26.84 U1.30
LMP2_EN_LOW: U1.27 U6.2 | length 544.1
  Component Side w10: U6.2 551.14,439.63 567.68,423.09 567.68,192.12 673.91,85.9 U1.27
LMP2_I2C_SCL: U1.26 U6.3 | length 547.6
  Component Side w10: U6.3 564.18,459.32 586.68,436.82 586.68,199.99 681.01,105.66 704.05,105.66 U1.26
LMP2_I2C_SDA: U1.25 U6.4 | length 547.6
  Component Side w10: U6.4 571.37,479 605.68,444.69 605.68,207.86 688.28,125.27 U1.25
LMP2_TEMP: U1.28 U6.8 | length 991.5
  Component Side w10: U6.8 272.86,538.06 267,543.91 267,568.14 280.78,581.92 558.22,581.92 586.14,554 586.14,493.99 628.41,451.72 628.41,239.46 646,221.87 v1(646,217) ; v1(655.64,64.57) 657.2,66.13 704.05,66.13 U1.28
  Bottom Layer w10: v1(646,217) 642.56,213.56 626.64,213.56 614,200.92 614,108.54 655.64,66.91 v1(655.64,64.57)
NetC1_2: C1.2 C2.2 L1.1 U1.9 | length 384
  Component Side w10: U1.9 1131.67,66.21 1178.54,113.08 C2.2 C1.2 1178.54,268.54 L1.1
NetC6_2: C6.2 C8.2 R1.1 U1.34 | length 470.9
  Component Side w10: R1.1 489.46,-329 489.46,-280 C8.2 ; U1.34 564.74,-51.9 516,-100.64 516,-197.96 493.46,-220.5 C6.2 485,-229.46 C8.2@485,-267.54 ; C8.2@485,-267.54 C8.2 ; C8.2@485,-267.54 C8.2
NetC11_2: C11.2 U1.41 | length 231.1
  Component Side w8: U1.41 807.47,-155.83 847.96,-196.32 847.96,-283.31 856.15,-291.5 872.54,-291.5 885.54,-304.5 C11.2
NetE1_1: E1.1 L2.1 | length 1057.2
  Component Side w15: v1(844.96,200.22) 847.45,202.71 854.24,202.71 868.13,216.59 868.13,223.47 881.65,237 L2.1
  Bottom Layer w25: v1(296,-248) 296,91.36 464.81,260.17 612.73,260.17 629.73,277.17 632.44,277.17 636.01,280.74 764.45,280.74 v1@844.39,200.79
NetL2_2: L2.2 U1.20 | length 100.3
  Component Side w10: U1.20 807.55,149.95 807.55,170.62 816.96,180.04 816.96,219.56 834.41,237 L2.2
NetL4_1: L4.1 R1.2 | length 57.1
  Component Side w10: L4.1 422.54,-385 422.54,-335 R1.2
NetL5_1: L5.1 U1.38 | length 140.2
  Component Side w10: L5.1 692.75,-204.72 715.18,-204.72 721.04,-198.87 721.04,-176.09 748.42,-148.71 U1.38
NetL6_1: L6.1 U2.13
NetR11_2: R11.2 R12.1 U2.8 | length 307.6
  Component Side w10: R11.2 1282.53,40.11 1335.47,40.11 R12.1 ; R12.1@1338.94,43.58 1338.94,45.47 1335,49.42 1335,69.42 1348.5,82.92 1375.42,82.92 v1(1377.5,85) ; v1(1439,-9) 1439.76,-9.76 1482.29,-9.76 U2.8
  Bottom Layer w10: v1(1377.5,85) 1380.94,81.56 1402.44,81.56 1439,45 v1(1439,-9)
NetR12_2: R12.2 R13.2 U2.9 | length 254
  Component Side w6: 1499,-66 1509.63,-66 U2.9
  Component Side w15: R12.2 1336,-16.17 R13.2 1384,-66 1499,-66
NetR13_1: R13.1 U2.7 | length 102.5
  Component Side w6: R13.1 1392.26,48.42 1408.42,48.42 1408.53,48.53 U2.7
NetU1_10: U1.10 X1.3 | length 163.3
  Component Side w10: U1.10@983.57,85.9 1060.77,85.9 1090.67,115.8 1090.67,120.53 1096.53,126.39 1103.83,126.39 1115.56,138.12 X1.3
NetU1_11: U1.11 X1.1 | length 141.3
  Component Side w10: U1.11@983.57,105.66 992.06,105.66 1010.8,124.4 1010.8,144.8 1030.21,164.21 1030.21,174.23 1045.86,189.87 1048.71,189.87 1060.44,201.61 X1.1
NetU1_35: U1.35 X2.1 | length 163.3
  Component Side w8: X2.1 582,-71.58 U1.35
NetU1_36: U1.36 X2.2 | length 214.3
  Component Side w10: X2.2 597.75,-211.21 605.49,-203.47 ccw(c544.03,-141.93) 631,-141.93 632.9,-140.03 632.9,-97.13 638.76,-91.27 U1.36
PAVDD: C3.2 C4.2 L3.1 U1.21 | length 267.1
  Component Side w10: U1.21 787.79,177.73 792.02,181.96 797.96,187.91 797.96,249.21 813.04,264.28 813.68,264.28 819.54,270.14 819.54,273 834.54,288 834.54,338 C3.2 L3.1
RE1: J2.2 U5.13 | length 586.4
  Component Side w10: U5.13 264.86,237.63 253.66,226.43 253.66,172.99 270.65,156 378.1,156 378.77,156.67 423.23,156.67 454.67,125.23 454.67,-91.14 448.81,-97 J2.2
RE2: J2.5 U6.13 | length 595.5
  Component Side w10: U6.13 255.63,439.63 196.66,380.66 196.66,149.34 293,53 J2.5
RESETn: C5.1 J1.10 U1.12 | length 1162.7
  Component Side w8: J1.10 913,-394 v1(1098,-394) ; U1.12 983.15,125.27 992.8,134.92 992.8,152.57 1012.21,171.97 1012.21,250.87 v1(1013.37,252.03) ; v1@1012.21,250.67 1031.54,270 C5.1
  Bottom Layer w8: v1(1013.37,252.03) 1013.37,179.4 1005.28,171.31 1005.28,6.91 1098,-85.82 v1(1098,-394)
RF_VDD: C7.2 C13.2 L1.2 L3.2 L5.2 U1.40 | length 1700.6
  Component Side w10: U1.40 787.87,-115.95 787.87,-179.87 v1(789,-181)
  Component Side w25: v1(612,-337) v1@611.77,-336.77 ; C7.2 666.73,-337.27 612.27,-337.27 v1@611.77,-336.77 ; L5.2 664.28,-274.53 606.78,-332.04 565.5,-332.04 C13.2 561.23,-336.77 v1@611.77,-336.77 ; L3.2 939.51,396 963,372.51 963,345.92 983.8,325.13 1073.73,325.13 1084.07,335.46 L1.2 ; v1(938,363.1) 938,385.29
  Bottom Layer w25: v1@612.81,-337 613.39,-336.43 633.57,-336.43 v1(789,-181) 741,-181 693.94,-133.94 693.94,128.94 729.72,164.72 859.67,164.72 880.46,185.52 880.46,305.56 v1(938,363.1)
SWCLK: J1.4 U1.1 | length 708.3
  Component Side w8: J1.4 763.19,-474.81 v1(763.19,-363.88) ; U1.1 994.31,-91.27 999,-95.95 999,-126.9 1025.1,-153 v1(1028,-153)
  Bottom Layer w8: v1(763.19,-363.88) 763.32,-364 1032.92,-364 1047,-349.92 1047,-249.24 1027,-229.24 1027,-154 v1(1028,-153)
SWDIO: J1.2 U1.2 | length 786.7
  Component Side w8: J1.2 713,-399 v1(715,-399) ; U1.2 1000.54,-71.58 1024.17,-95.21 1024.17,-101.17 v1(1028,-105)
  Bottom Layer w8: v1(715,-399) 775,-399 793,-381 1039.96,-381 1064,-356.96 1064,-141 v1(1028,-105)
SWO: J1.6 U1.3 | length 744.2
  Component Side w8: J1.6 v1(813,-408) ; U1.3 U1.3 1025.95,-51.95 v1(1026,-52)
  Bottom Layer w8: v1(813,-408) 817.69,-408 827.69,-398 1047,-398 1081,-364 1081,-107 v1(1026,-52)
V3V: C9.2 C10.2 C12.2 C23.1 J1.1 L4.2 L6.2 U1.39 U1.42 U2.11 U3.3 U3.8 U4.1 U4.14 U5.6 U6.6 | length 5564.8
  Component Side w6: 1549,-70.86 U2.11
  Component Side w10: U5.6 493.3,316.37 v1(514,295.67) ; U6.6 555.51,518.37 v1(556.88,517) ; L4.2 491.46,-437 v1(491,-437) 491,-440 594,-543 677,-543 703.04,-569.04 703.04,-604.8 J1.1 ; U1.39 768.1,-155.9 751.54,-172.46 C10.2 C12.2 751.54,-310.54 803,-362 1159,-362 ; U1.42 827.16,-150.06 865.96,-188.87 865.96,-205.43 885.54,-225 ; C9.2 885.54,-225 ; U4.14 1137.32,-232.18 1139.84,-234.71 ; U4.1 1342,-182.37 v1(1342,-180) ; v1@1338.63,-182.37 1159,-362 ; 885.54,-225 975.06,-225 984.76,-234.71 1139.84,-234.71 ; 1139.84,-234.71 1159,-253.87 1159,-362
  Component Side w15: L6.2@1464,-126.55 1488.55,-102 1517.86,-102 1549,-70.86
  Component Side w25: v1(621,564) 621.81,564 623.81,566 U3.3 ; U3.8 1000.19,666 1004.19,662 v1(1005,662) ; v1(1238,320) v1(1238,396)
  Component Side w30: v1(1342,-180) 1447,-180
  Bottom Layer w10: v1(491,-437) 491,-440 594,-543 677.21,-543 704.72,-515.48 955.28,-515.48 982.79,-543 1023.6,-543 1342,-224.6 v1(1342,-180)
  Bottom Layer w25: v1(514,295.67) 576.33,295.67 654,373.34 654,491 ; v1(556.88,517) 621,517 ; v1(621,564) 621,511 621,505.64 635.64,491 654,491 ; v1(1005,662) 1005,576.6 1006.01,575.59 1006.01,491 ; v1(1238,320) 1238.81,320 1261.64,297.17 1270.32,297.17 1288,279.49 1288,-126 v1(1342,-180) ; v1(1238,396) 1101.01,396 1006.01,491 ; 654,491 1006.01,491
V_Batt: C21.1 C22.2 P1.1 R4.2 R15.2 U2.1 | length 1420.1
  Component Side w15: R4.2 767.1,264.63 767.1,425.37 v1(767.73,426)
  Component Side w20: P1.1 1429.28,393.46 1536.21,393.46 1545,384.67 1545,299.94 1596,248.94 1596,153 1641.89,107.11 1641.89,57.69 1632.87,48.67 1615.09,48.67 U2.1
  Bottom Layer w15: v1(767.73,426) 801.71,459.98 996.02,459.98 1099,357 1389.22,357 1398.01,365.79 1398.01,371.27 P1.1
VREF: U3.1 U5.11 U6.11 | length 848.4
  Component Side w10: v1(242.56,486.69) 247.02,486.69 254.71,479 U6.11 ; v1(249,291) 249.17,291 263.17,277 U5.11 ; v1(621,663) 622.5,664.5 716.04,664.5 U3.1
  Bottom Layer w10: v1(242.56,486.69) 242.56,486.28 v1@246.92,481.92 ; v1(249,291) 246.5,293.5 246.5,473.5 242.5,477.5 v1@246.92,481.92 ; v1(621,663) 619,665 430,665 v1@246.92,481.92
WE1: J2.3 U5.12 | length 555.1
  Component Side w10: U5.12 288.12,257.24 245.86,257.24 234.66,246.04 234.66,165.12 262.78,137 385.97,137 386.64,137.67 415.36,137.67 435.67,117.36 435.67,-39.51 429.81,-45.37 402.63,-45.37 J2.3
WE2: J2.4 U6.12 | length 671.6
  Component Side w10: U6.12 248.45,459.32 177.66,388.53 177.66,141.47 316.13,3 J2.4
pads on no net: J1.7 J1.8 U1.4 U1.13 U1.14 U1.15 U1.16 U1.24 U1.29 U1.47 U1.48 U1.49 U2.10 U4.2 U4.3 U4.5 U4.10 U4.15 U5.5 U5.9 U5.10 U6.1 U6.5 U6.9 U6.10

## Polygon pours and split planes (outlines as drawn)
GND on Component Side "POUR_TOP" (solid, pour order 35): 308.7,644.39 442.01,733.29 623.76,804.88 810.83,832.19 1109.23,788.64 1320.57,687.73 1562.71,408.35 1662.63,127.11 1654.35,-136.61 1636.58,-238.84 1612.58,-302.84 1562.71,-405.38 1501.26,-502.82 1438.91,-565.17 1394.22,-609.86 1341.24,-662.84 1290.67,-697.49 1235.63,-662.84 658.78,-662.84 572.58,-609.86 384.63,-415.5 384.36,-388.52 308.7,-238.4 308.7,132.15 169,155.09 169,496.08 221.81,562.56
GND on Component Side "GND_L01_P037" (solid, pour order 37): 1399,494 1399,486 1439,486 1440,487 1440,494
V_Batt on Component Side "V_BATT_L01_P034" (solid, pour order 34): 1401,423 1401,129 1467,129 1467,423
V3V on Component Side "V3V_L01_P033" (solid, pour order 33): 1430.96,-123.33 1431,-123.33 1431,-353 1512,-353 1512,-286 1464,-286 1464,-123
NetL6_1 on Component Side "NETL6_1_L01_P031" (solid, pour order 31): 1582.44,-34 1621,-34 1621,-254.82 1583.56,-254.82
GND on Top Paste "EFR32 Gnd Pad" (solid, pour order 32): 738,117 936,117 936,-82 738,-82
GND on Top Solder "EFR32 Gnd Pad" (solid): 738,117 936,117 936,-82 738,-82
AGND on Bottom Layer "AGND_L02_P036" (solid, pour order 36): 313,336.59 417,336.59 417,218.59 313,218.59
GND on Bottom Layer "GND_POUR_BOT" (solid, pour order 40): 184.08,511.53 450.39,734.81 617.01,798.92 749.05,833.72 1007.11,813.36 1173.41,754.52 1273.33,701.55 1384.08,611.53 1400.08,611.53 1523.51,472.09 1544.08,407.53 1556.08,407.53 1591.86,341.58 1608.08,287.53 1658.05,170.71 1677.04,-139.51 1652.08,-164.47 1608.08,-304.47 1536.08,-428.47 1523.51,-481.03 1492.08,-512.47 1347.87,-668.47 1336.08,-668.47 1206.96,-757.58 1060.08,-788.47 998.08,-818.47 876.08,-846.09 617.01,-757.58 249.98,-538.56 196.08,-528.47 43.34,-287.32 -4.15,-9.47 -4.15,-5.72 73.94,323.38 176.08,511.53
AGND on Bottom Layer "AGND_L02_P038" (solid, pour order 38): 315,537 419,537 419,419 315,419

## Keep-outs
Keep-Out Layer:
  circle w10: c837.39,-4 r837.76

## Other copper
Component Side:
  pour cut-out: 714.36,-841.61 777.41,-841.61 782.71,-836.3 782.16,-835.75 782.16,-832.25 763.51,-832.25 741.75,-810.49 741.75,-798.47 725.79,-798.47 727.61,-800.29 727.61,-828.36
Bottom Layer:
  pour cut-out: 13,-103 25,-91 269,-91 269,-235 369,-335 391.48,-525.11 693,-667 1149,-667 1217,-735 1217,-743 1213,-743 1157,-799 1001.28,-824.4 941,-835 633,-835 531,-805 401,-735 173.98,-526.14 95.83,-414.44 38.27,-274.48 13,-175 9,-171 9,-103
  pour cut-out: 61,241 105,241 137,209 133,205 133,-99 131,-97 19,-97 19,-37 9,-27 14.59,-21.41 14.59,94.59 25,105 25,153 45,173 45,225

## Silkscreen, mask and mechanical layers (free items; w line width, h text height)
Top Overlay:
  circle w11.81: c1157.27,550.05 r125
  circle w11.81: c1157.27,-558.05 r125
  circle w11.81: c197.62,-4 r125
  lines w10: 1509,466 1324,466 1287,429 1287,77 1281,71 1263,71 1245,53 1245,-62 1261,-78 1360,-78 1391,-109 1391,-447 1423,-479 1506,-479 1517,-468
  text "Voltage Reg" at 1363,440 h15
  text "CE2" at 462,90 h12 r90
  text "RE2" at 462,39 h12 r90
  text "WE2" at 462,-12 h12 r90
  text "WE1" at 463,-61 h12 r90
  text "RE1" at 463,-112 h12 r90
  text "3v3" at 1327,-154 h15
  text "CE1" at 463,-162 h12 r90
Bottom Overlay:
  text "CU Fabric Sensor" at 1072,-357 h15
Mechanical 1:
  lines w62.5: -18.66,-154.94 ccw(c837.39,-4) 686.44,-860.04 ; -18.66,146.94 cw(c837.39,-4) 686.44,852.04 ; 988.33,-860.04 ccw(c837.39,-4) 1693.43,-154.94 ; 988.33,852.04 cw(c837.39,-4) 1693.43,146.94

## Text inside footprints (layer, text, board x,y; h text height)
J1: Top Overlay "10" at 1001.98,-501.57 h15 r90; Top Overlay "2" at 679.14,-462.2 h15 r90; Top Overlay "1" at 679.14,-639.37 h15 r90